# Altium PCB Robotic Claw PCB.PcbDoc
Units mil, origin at the board's own origin, x right, y up, seen from the top; angles counter-clockwise.
Board outline 4050 x 3490 mil, 4 copper layers (Top Layer, Int1 (GND), Int2 (PWR), Bottom Layer), stack 53.912 mil thick; 50 components, 47 nets, 200 pads, 15 vias.
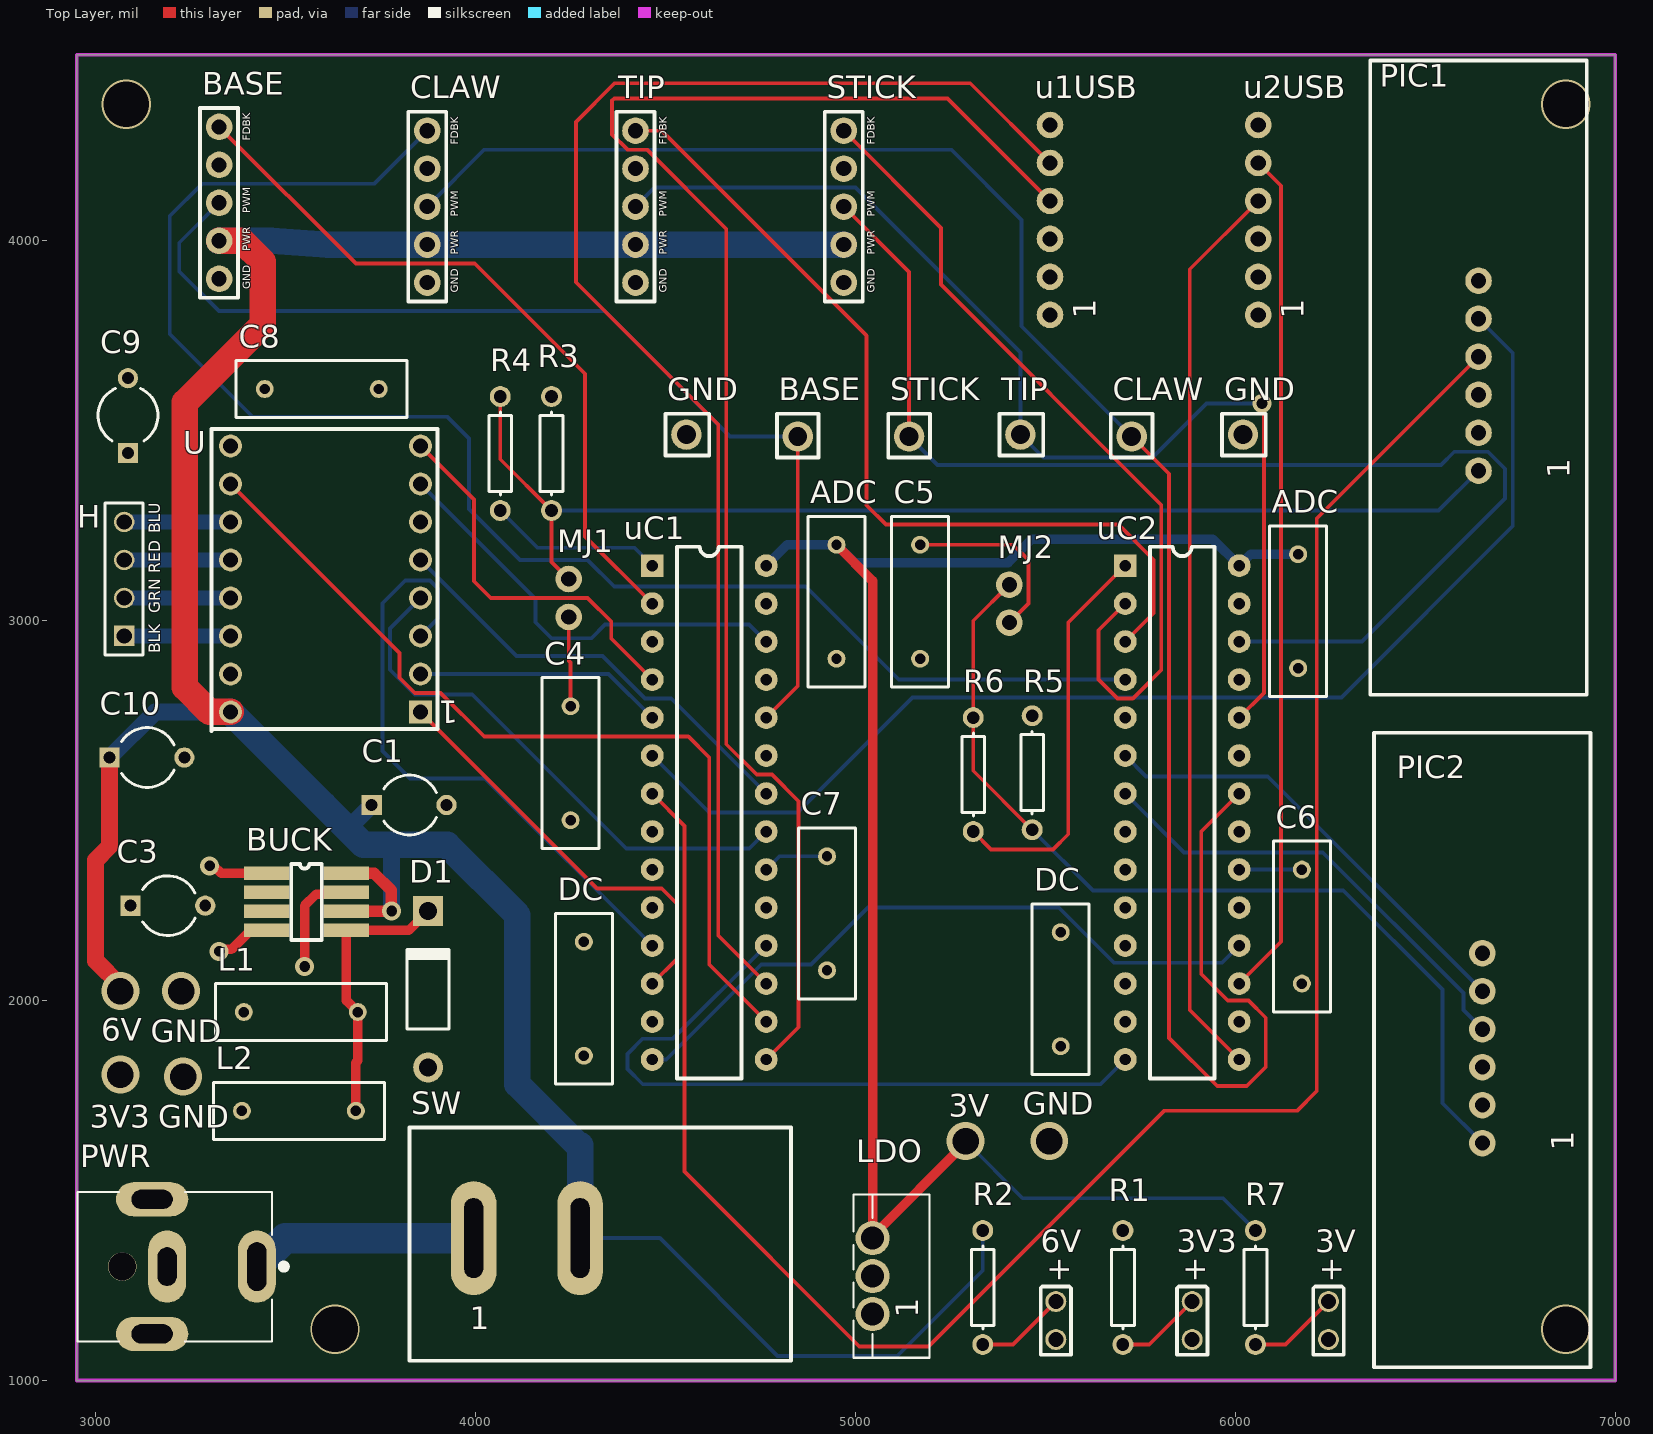
[diagram p0: Top Layer view]
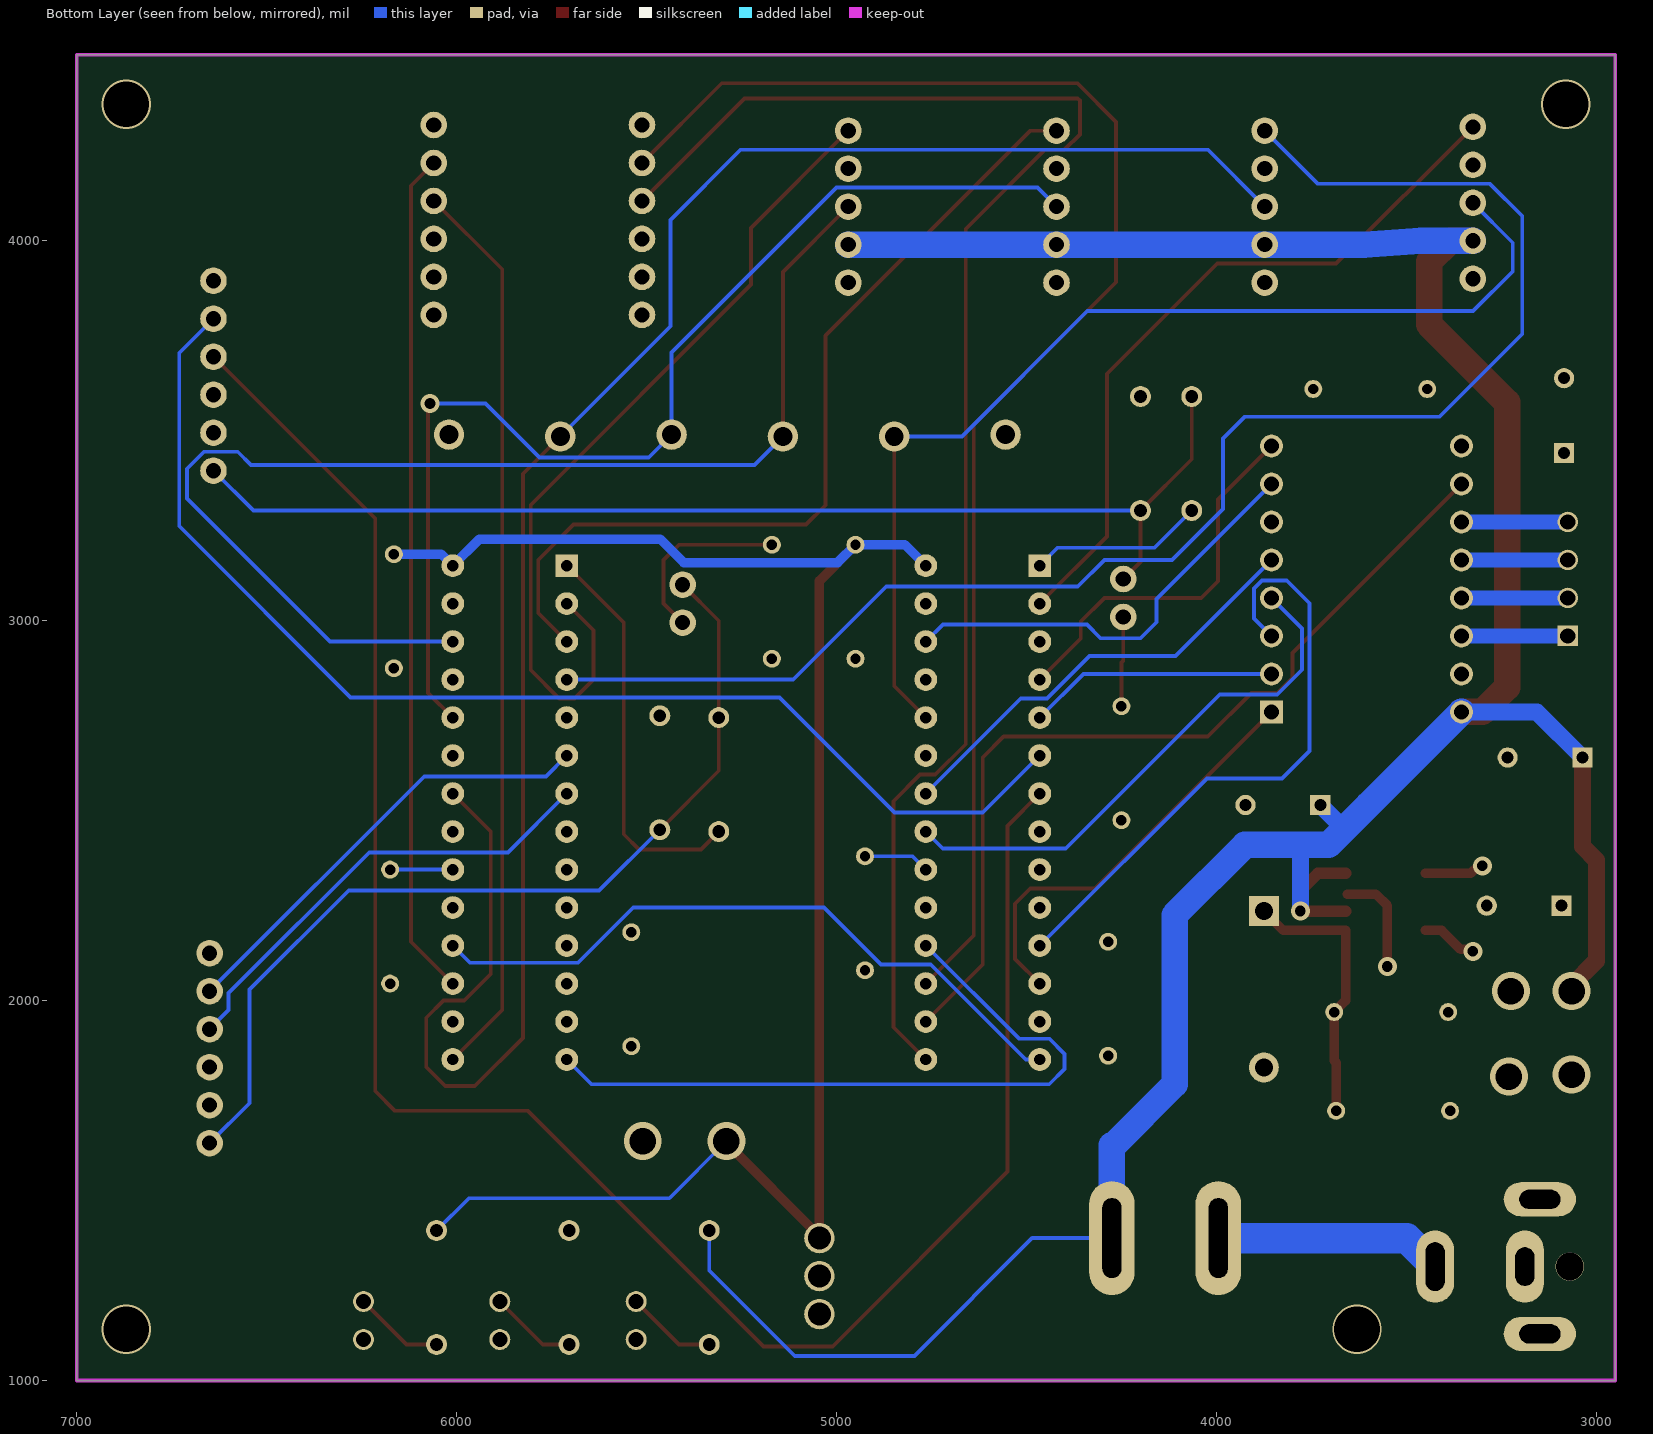
[diagram p1: Bottom Layer view, seen from below]
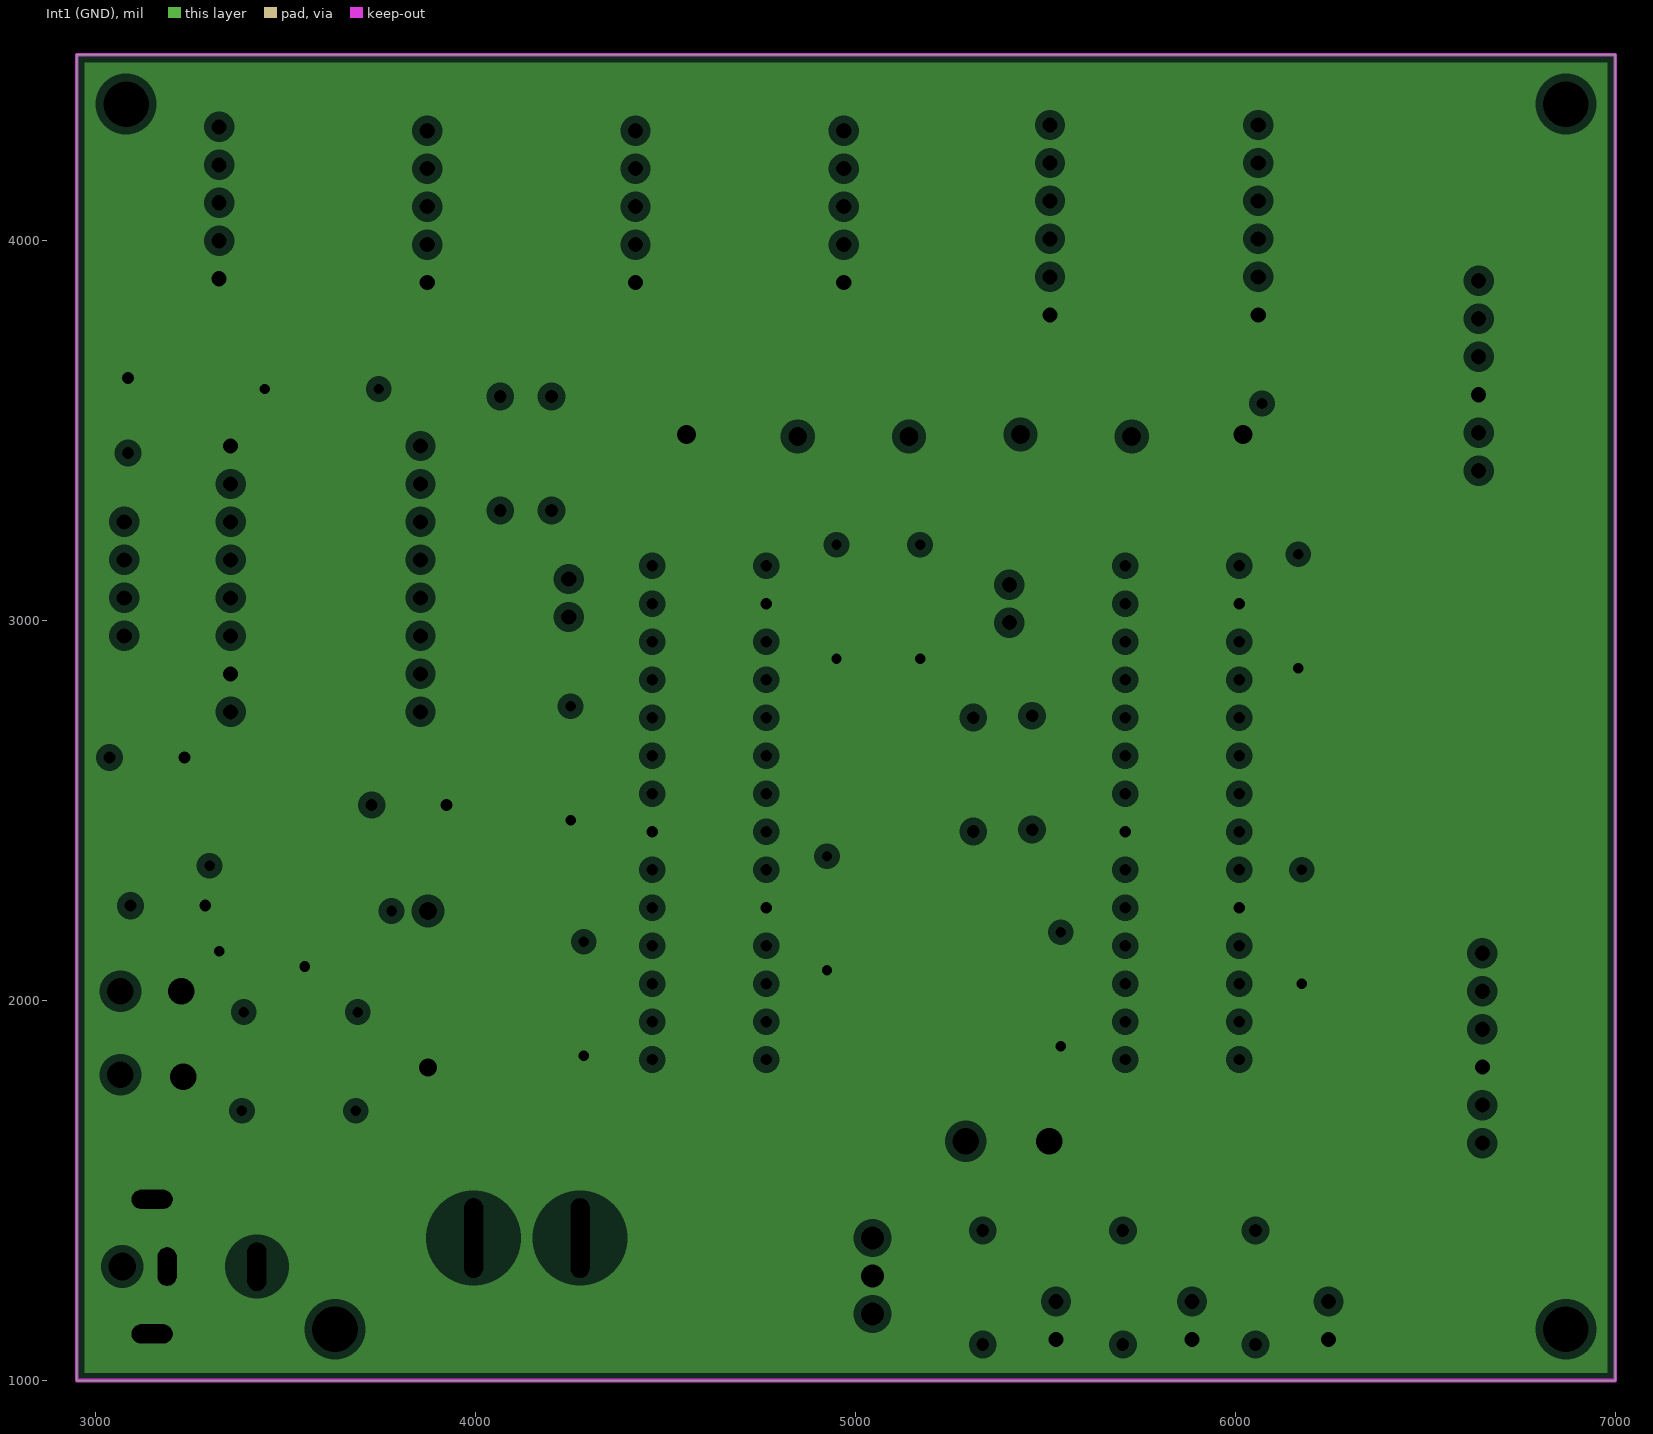
[diagram p2: Int1 (GND), clearances drawn from the general rule]
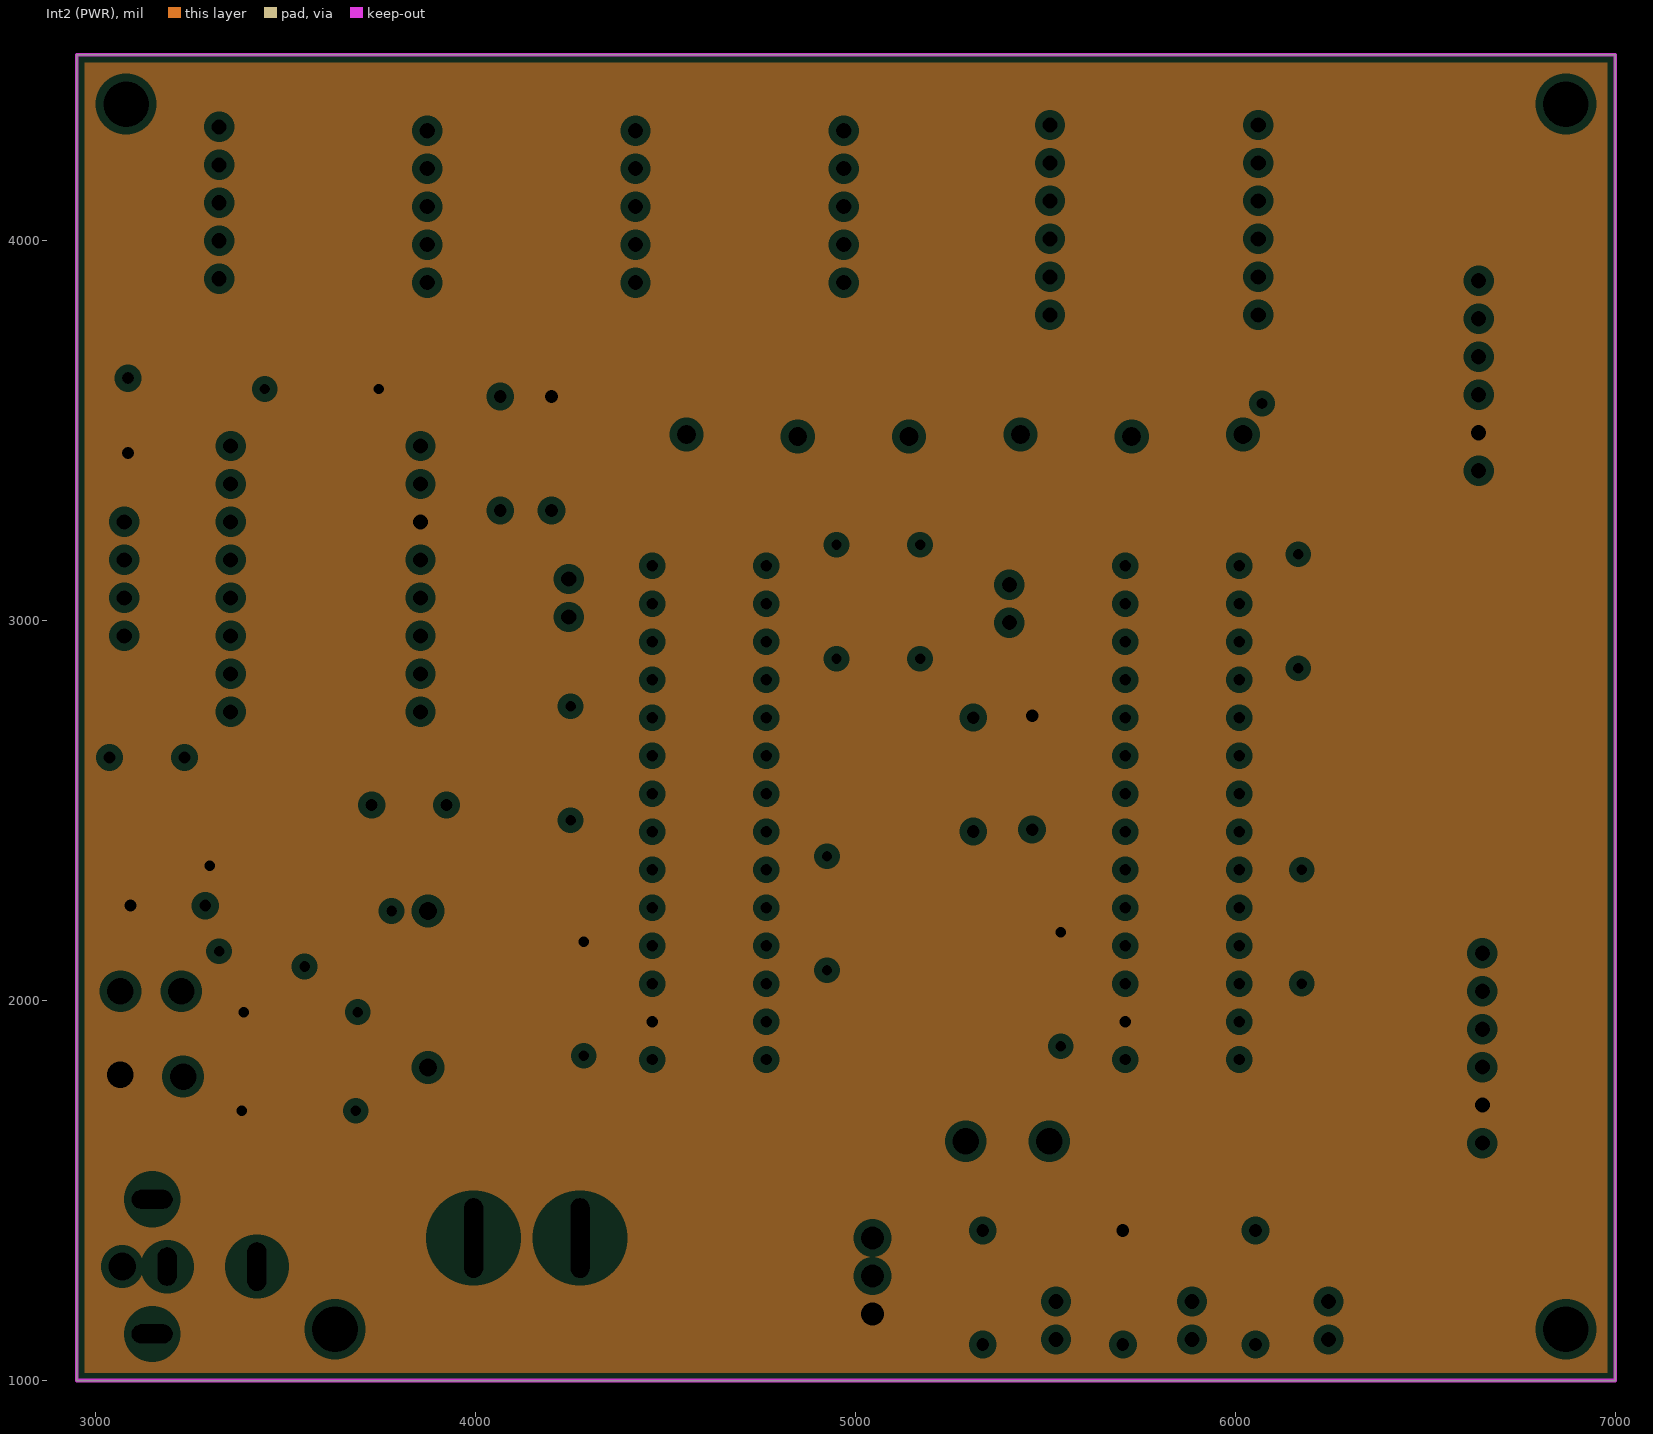
[diagram p3: Int2 (PWR), clearances drawn from the general rule]

## Layer stack, top to bottom
Top Solder: solder mask 1, SM-001, Dk 4
Top Layer: signal copper 1.378
Dielectric 1: prepreg 5.1, PP-017, Dk 4.3
Dielectric 2: prepreg 5.1, PP-017, Dk 4.3
Int1 (GND): plane copper 1.378, net GND
Dielectric 3: core 28, Core-039, Dk 4.8
Int2 (PWR): plane copper 1.378, net 3V3
Dielectric 4: prepreg 5.1, PP-017, Dk 4.3
Dielectric 5: prepreg 5.1, PP-017, Dk 4.3
Bottom Layer: signal copper 1.378
Bottom Solder: solder mask 1, SM-001, Dk 4

## Board outline
2950,1000 7000,1000 7000,4490 2950,4490

## Design rules (kind name [scope] priority, off if disabled: settings)
Clearance [All] p1: gap=10 ignorepadtopadclearanceinfootprint=FALSE except(0: Arc-Hole Track-Hole SMDPad-Hole THPad-Hole Via-Hole Fill-Hole Poly-Hole Region-Hole Text-Hole)
PlaneClearance [All] p1: clearance=20
PlaneConnect [All] p1: planeconnectstyle=Relief reliefexpansion=20 reliefentries=4 reliefconductorwidth=10 reliefairgap=10
PolygonConnect [All] p1: connectstyle=Relief reliefconductorwidth=10 reliefentries=4 polygonreliefangle="90 Angle" airgapwidth=10
RoomDefinition "Robotic Claw Schematic" [InComponentClass('Robotic Claw Schematic')] p1: confinementstyle=ConfineIn formatcopy=TRUE lockcomponents=FALSE outline 7045,1060 20170,1060 20170,2540 7045,2540
RoutingVias [All] p1: holewidth=28 width=50 viastyle="Through Hole" minholewidth=28 minwidth=50 maxholewidth=28 maxwidth=50
SolderMaskExpansion [All] p1: expansion=4 istentingtop=FALSE
Width A2 [InNet('A2')] p1: maxlimit=40 minlimit=40 preferedwidth=40 minimp=50.000000 maximp=50.000000 favimp=50.000000
Width B1 [InNet('B1')] p2: maxlimit=40 minlimit=40 preferedwidth=40 minimp=50.000000 maximp=50.000000 favimp=50.000000
Width B2 [InNet('B2')] p3: maxlimit=40 minlimit=40 preferedwidth=40 minimp=50.000000 maximp=50.000000 favimp=50.000000
Width A1 [InNet('A1')] p4: maxlimit=40 minlimit=40 preferedwidth=40 minimp=50.000000 maximp=50.000000 favimp=50.000000
Width 6V_IN [InNet('6V_IN')] p5: maxlimit=50 minlimit=50 preferedwidth=50 minimp=50.000000 maximp=50.000000 favimp=50.000000
Width 6V [InNet('6V')] p6: maxlimit=45 minlimit=45 preferedwidth=45 minimp=50.000000 maximp=50.000000 favimp=50.000000
Width 3V [InNet('3V')] p7: maxlimit=25 minlimit=25 preferedwidth=25 minimp=50.000000 maximp=50.000000 favimp=50.000000
Width 3V3 [InNet('3V3')] p8: maxlimit=25 minlimit=25 preferedwidth=25 minimp=50.000000 maximp=50.000000 favimp=50.000000
Width [All] p9: maxlimit=10 minlimit=10 preferedwidth=10
28 further rules are at their usual default settings.

## Classes and differential pairs
component class "Robotic Claw Schematic": 3V 3V3 6V ADC BASE BUCK C1 C3 C4 C5 C6 C7 C8 C9 C10 CLAW D1 DC GND H L1 L2 LDO MJ1 MJ2 PIC1 PIC2 PWR R1 R2 R3 R4 R5 R6 R7 STICK TIP U u1USB u2USB uC1 uC2

## Components (designator, comment, footprint, x,y, rotation, side; value= is the part's Value field where it differs from the comment)
3V "LED0" LED-0 6245,1157.95 r90 top
3V3 "LED0" LED-0 5886.18,1157.95 r90 top
6V "LED0" LED-0 5527.36,1157.95 r90 top
ADC "Cap" RAD-0.3 6165,3025 r90 top value=0.1u
ADC "Cap" RAD-0.3 4950,3050 r90 top value=0.1u
BASE "Test Point 2" "Test Point2" 4848,3485 r90 top
BASE "5-PIN HEADER FOR SERVOS WITH FEEDBACK" "5-PIN HEADER FOR SERVOS WITH FEEDBACK" 3325,3900 r90 top
BUCK "BUCK" "6V TO 3V3 BUCK" 3450,2335 r0 top
C1 "Cap2" CAPR5-4X5 3825,2515 r0 top value=33u
C3 "Cap2" CAPR5-4X5 3190,2250 r0 top value=100u
C4 "Cap" RAD-0.3 4250,2625 r90 top value=0.1u
C5 "Cap" RAD-0.3 5170,3050 r90 top value=0.1u
C6 "Cap" RAD-0.3 6175,2195 r90 top value=10u
C7 "Cap" RAD-0.3 4925,2230 r90 top value=10u
C8 "Cap" RAD-0.3 3595,3610 r0 top value=100n
C9 "Cap2" CAPR5-4X5 3085,3540 r90 top value=100u
C10 "Cap2" CAPR5-4X5 3135,2640 r0 top value=100u
CLAW "5-PIN HEADER FOR SERVOS WITH FEEDBACK" "5-PIN HEADER FOR SERVOS WITH FEEDBACK" 3873,3890 r90 top
CLAW "Test Point 2" "Test Point2" 5727,3485 r90 top
D1 "Diode 11DQ03" DO-204AL 3875,2030 r90 top
DC "Cap" RAD-0.3 5540,2030 r90 top value=0.1u
DC "Cap" RAD-0.3 4285,2005 r90 top value=0.1u
GND "Test Point 2" "Test Point2" 6020,3490 r0 top
GND "Test Point 2" "Test Point2" 4555,3490 r0 top
H "4-Pin Header For Steppers" "4-Pin Header for Steppers" 3075,2960 r90 top
L1 "Cap" RAD-0.3 3540,1970 r180 top value=100uH
L2 "Cap" RAD-0.3 3535,1710 r180 top value=100uH
LDO "MCP1826S-3002E/AB" TO-220_AB_MC_MCH 5045,1175 r90 top
MJ1 "Jumper" JUMPER 4245,3010 r90 top
MJ2 "Jumper" JUMPER 5405,2995 r90 top
PIC1 "PICKIT3 Header" "PICKIT3 Header" 6640,3395 r90 top
PIC2 "PICKIT3 Header" "PICKIT3 Header" 6650,1625 r90 top
PWR "Barrel Connector 2.5x5.5mm 8A" "Barrel Connector 2.5x5.5mm 8A" 3424.33,1300 r180 top
R1 "Res1" AXIAL-0.3 5703.82,1245 r90 top value=240
R2 "Res1" AXIAL-0.3 5335,1245 r90 top value=500
R3 "Res1" AXIAL-0.3 4200,3440 r90 top value=10K
R4 "Res1" AXIAL-0.3 4065,3440 r90 top value=470
R5 "Res1" AXIAL-0.3 5465,2600 r90 top value=10K
R6 "Res1" AXIAL-0.3 5310,2595 r90 top value=470
R7 "Res1" AXIAL-0.3 6052.64,1245 r90 top value=240
STICK "Test Point 2" "Test Point2" 5141,3485 r90 top
STICK "5-PIN HEADER FOR SERVOS WITH FEEDBACK" "5-PIN HEADER FOR SERVOS WITH FEEDBACK" 4969,3890 r90 top
SW "ROCKER SWITCH 10A" "ROCKER SWITCH 10A" 3995,1375 r0 top
TIP "Test Point 2" "Test Point2" 5434,3490 r0 top
TIP "5-PIN HEADER FOR SERVOS WITH FEEDBACK" "5-PIN HEADER FOR SERVOS WITH FEEDBACK" 4421,3890 r90 top
U "A4988_STEPPER_MOTOR_DRIVER_CARRIER" "MP6500 Stepper Motor Driver Carrier" 3605,3110 r180 top
u1USB "USB Programming Header" "6 Pin Header" 5512,3805 r90 top
u2USB "USB Programming Header" "6 Pin Header" 6060,3805 r90 top
uC1 "DSPIC33EP512MC502-I/SP" "dsPIC33EP512MC502 - duplicate" 4465,3145 r0 top
uC2 "DSPIC33EP512MC502-I/SP" "dsPIC33EP512MC502 - duplicate" 5710,3145 r0 top

## Footprints (in the part's own frame and the unit in brackets; to place one, negate y for a bottom-side part, rotate by r counter-clockwise, add the part's x,y. Pads: shape width x height; smd on the part's side, far side on the other; paste and mask are expansions set on the pad)
"4-Pin Header for Steppers" [mm] "0.1 INCH SPACING"
  round 1.37 hole 1.02: 01(5.08,0) 02(2.54,0) 03(7.62,0)
  rect 1.37x1.37 hole 1.02: 04(0,0)
  silkscreen extent -1.27,-1.27 8.89,1.27
"5-PIN HEADER FOR SERVOS WITH FEEDBACK" [mil] "FOURTH PIN IS DISCONNECTED"
  round 70 hole 40: 1(0,0) 2(100,0) 3(200,0) 4(300,0) 5(400,0)
  silkscreen extent -50,-50 450,50
"6 Pin Header" [mil]
  round 70 hole 40: 1(0,0) 2(100,0) 3(200,0) 4(300,0) 5(400,0) 6(500,0)
"6V TO 3V3 BUCK" [mil]
  rect 120x35 smd: 1(0,0) 2(0,-50) 3(0,-100) 4(0,-150) 5(210,-150) 6(210,-100) 7(210,-50) 8(210,0)
  silkscreen extent 65,-175 145,25
AXIAL-0.3 [mm] "Axial Device, Thru-Hole; 2 Leads; 0.3 in Pin Spacing"
  round 1.4 hole 0.85: 1(-3.81,0) 2(3.81,0)
  silkscreen extent -2.77,-0.76 2.77,0.76
"Barrel Connector 2.5x5.5mm 8A" [mil] "CUI Devices PJ-063BH"
  oval 100x190 hole 50 slot 128 at 90 deg: 1(0,0)
  oval 100x190 hole 50 slot 101 at 90 deg: 2(236.22,0)
  oval 190x90 hole 50 slot 108 at 0 deg: S1(275.59,177.17) S2(275.59,-177.17)
  round 75 hole 73 unplated: ""(354.33,0)
  silkscreen extent -79,-197 472,197
CAPR5-4X5 [mm] "Capacitor; 2 Leads"
  rect 1.35x1.35 hole 0.8: 1(-2.5,0)
  round 1.35 hole 0.8: 2(2.5,0)
  silkscreen extent -1.69,-2 1.82,2
DO-204AL [mm] "Diode, Axial; Body 5.2 x 2.7 mm (LxDia. max), Lead Dia. 0.86 mm (max)"
  round 2 hole 1.2: 1(-5.23,0)
  rect 2x2 hole 1.2: 2(5.23,0)
  silkscreen extent -2.65,-1.4 2.75,1.4
"dsPIC33EP512MC502 - duplicate" [mil]
  rect 60x60 hole 30: 1(0,0)
  round 60 hole 30: 2(0,-100) 3(0,-200) 4(0,-300) 5(0,-400) 6(0,-500) 7(0,-600) 8(0,-700) 9(0,-800) 10(0,-900) 11(0,-1000) 12(0,-1100) 13(0,-1200) 14(0,-1300) 15(300,-1300) 16(300,-1200) 17(300,-1100) 18(300,-1000) 19(300,-900) 20(300,-800) 21(300,-700) 22(300,-600) 23(300,-500) 24(300,-400) 25(300,-300) 26(300,-200) 27(300,-100) 28(300,0)
  silkscreen extent 65,-1350 235,50
JUMPER [mil]
  round 70 hole 40: 1(0,0) 2(100,0)
LED-0 [mm] "LED; 2 Leads"
  round 1.4 hole 1: 1(1.27,0) 2(-1.27,0)
  silkscreen extent -2.29,-1.02 2.29,1.02
"MP6500 Stepper Motor Driver Carrier" [mm]
  rect 1.53x1.53 hole 1.02: 1(-6.35,8.89)
  round 1.53 hole 1.02: 2(-6.35,6.35) 3(-6.35,3.81) 4(-6.35,1.27) 5(-6.35,-1.27) 6(-6.35,-3.81) 7(-6.35,-6.35) 8(-6.35,-8.89) 9(6.35,-8.89) 10(6.35,-6.35) 11(6.35,-3.81) 12(6.35,-1.27) 13(6.35,1.27) 14(6.35,3.81) 15(6.35,6.35) 16(6.35,8.89)
  silkscreen extent -7.49,-10.03 7.62,10.16
"PICKIT3 Header" [mil]
  round 70 hole 40: 1(0,0) 2(100,0) 3(200,0) 4(300,0) 5(400,0) 6(500,0)
  silkscreen extent -590,-285 1080,285
RAD-0.3 [mm] "Radial Cap, Thru-Hole; 2 Leads; 0.3 in Pin Spacing"
  round 1.2 hole 0.7: 1(-3.81,0) 2(3.81,0)
  silkscreen extent -5.71,-1.91 5.71,1.91
"ROCKER SWITCH 10A" [mil] "SWITCH COMPONENTS RF1-1A-DC-2-B"
  oval 120x300 hole 210 slot 50 at 0 deg: 1(0,0) 2(280,0)
  silkscreen extent -169,-323 835,291
"Test Point2" [mil] "TP"
  round 80 hole 50: 1(0,0)
  silkscreen extent -55,-55 60,55
TO-220_AB_MC_MCH [mil]
  round 90 / inner round 80 / far side round 80 hole 60 mask+0: 1(0,0) 2(100,0) 3(200,0)
  silkscreen extent -115,-150 315,50, body extent 0,0 10,10, height 10

## Part data
3V 3V3 6V: "Typical INFRARED GaAs LED", LatestRevisionDate=08-Jul-2005, LatestRevisionNote="Mech Layer 1 removed.", PackageDescription="LED; 2 Leads", PackageReference=LED-0, Published=8-Jun-2000, Publisher="Altium Limited"
ADC ADC C1 C3 C4 C5 C6 C7 C8 C9 C10 DC DC L1 L2: "Capacitor", Publisher="Altium Limited"
  ADC ADC C4 C5 C6 C7 C8 DC DC L1 L2: LatestRevisionDate=17-Jul-2002, LatestRevisionNote="Re-released for DXP Platform.", PackageDescription="Radial Cap, Thru-Hole; 2 Leads; 0.3 in Pin Spacing", PackageReference=RAD-0.3, Published=8-Jun-2000
  C1 C3 C9 C10: PackageDescription="Capacitor; 2 Leads", PackageReference=CAPR5-4X5, Published=23-Sep-2002
BASE CLAW STICK TIP: "Fourth pin is disconnected."
D1: "Schottky Rectifier", Code_JEDEC=DO-204-AL, ComponentLink1Description="Manufacturer Link", ComponentLink1URL=http://www.irf.com/, ComponentLink2Description=Datasheet, ComponentLink2URL=http://www.irf.com/product-info/datasheets/data/11dq03.pdf, DatasheetVersion=Dec-1997, LatestRevisionDate=17-Jul-2002, LatestRevisionNote="Re-released for DXP Platform.", PackageDescription="Diode, Axial; Body 5.2 x 2.7 mm (LxDia. max), Lead Dia. 0.86 mm (max)", PackageReference=DO-204AL, Published=8-Jun-2000, Publisher="Altium Limited"
H: "TSW - Samtec 2.54mm Pin Header 11.30mm Overall Pin Length (23) - Fast Stock", Package=None, Availability="In Stock", Check_prices=https://www.snapeda.com/parts/TSW-104-23-S-S/Samtec/view-part/2892034/?ref=eda, MF=Samtec, MP=TSW-104-23-S-S, Price=None, Purchase-URL=https://pricing.snapeda.com/search/part/TSW-104-23-S-S/?ref=eda, SnapEDA_Link=https://www.snapeda.com/parts/TSW-104-23-S-S/Samtec/view-part/2892034/?ref=snap
LDO: "No Description Available", Built_By=EMA_Jessica, Copyright="Copyright (C) 2018 Accelerated Designs. All rights reserved", Manufacturer_Part_Number=MCP1826S-3002E/AB, RefDes=RefDes, SourceLibrary=Microchip_2019-08-23_21, Type=DEV, Vendor=Microchip
PWR: "2.5 x 5.5 mm, 8.0 A,   / CUI Devices PJ-063BH", Package=None, Availability=Unavailable, MF="CUI Devices", MP=PJ-063BH, Price=None, SnapEDA_Link=https://www.snapeda.com/parts/PJ-063BH/CUI%20Devices/view-part/703426/?ref=snap
R1 R2 R3 R4 R5 R6 R7: "Resistor", LatestRevisionDate=17-Jul-2002, LatestRevisionNote="Re-released for DXP Platform.", PackageDescription="Axial Device, Thru-Hole; 2 Leads; 0.3 in Pin Spacing", PackageReference=AXIAL-0.3, Published=8-Jun-2000, Publisher="Altium Limited"
SW: "SWITCH COMPONENTS RF1-1A-DC-2-B"
U: "Stepper Motor Driver", Package=None, Availability=Unavailable, MF=Pololu, MP="A4988 STEPPER MOTOR DRIVER CARRIER", Price=None, SnapEDA_Link=https://www.snapeda.com/parts/A4988%20STEPPER%20MOTOR%20DRIVER%20CARRIER/Pololu/view-part/1499394/?ref=snap
uC1 uC2: "28-Pin DIP", Mfr_Name=Microchip, Copyright="Copyright (C) 2022 Ultra Librarian. All rights reserved.", Digi-Key_Part_Number_1=DSPIC33EP512MC502-I/SP-ND, Manufacturer_Part_Number=DSPIC33EP512MC502-I/SP, RefDes=RefDes, Type=DEV

## Via types
v1: diameter 100, hole 70, Top Layer to Bottom Layer, 6 vias
v2: diameter 50, hole 28, Top Layer to Bottom Layer, 5 vias
v3: diameter 130, hole 120, Top Layer to Bottom Layer, 4 vias

## Nets (pads, with @x,y where several pads share a name; then routed paths per layer and width w, separated by ;. In a path a pad name is that pad's centre, name@x,y a point inside that pad or via, vN(x,y) a via of type N, cw(c..) or ccw(c..) an arc to the next point about the centre after c; other vN are vias at no path point)
3V: ADC.2 LDO.3 R7.2 uC1.28 uC2.28 | length 4585.2
  Top Layer w25: ADC.2@4950,3200 5045,3105 LDO.3@5045,1380 ; LDO.3 LDO.3@5045,1380 ; v1(5290,1630) 5290,1625 LDO.3@5045,1380
  Bottom Layer w10: v1(5290,1630) 5440,1480 5967.64,1480 R7.2
  Bottom Layer w25: uC1.28 4820,3200 4950,3200 4997,3153 5402,3153 5464,3215 5940,3215 uC2.28 6040,3175 ADC.2@6165,3175
3V3: BUCK.1 C3.1 C8.2 C9.1 DC.2 L1.2 L2.2 LDO.1 PIC1.2 PIC2.2 R1.2 R3.2 R5.2 U.6 uC1.13 uC2.13 | length 158.3
  Top Layer w10: v2(3300,2355) v2@3310.82,2355
  Top Layer w25: v2@3310.82,2355 3330.82,2335 BUCK.1
  other v1: 3065,1805
6V: BASE.2 BUCK.6 BUCK.8 C1.1 C10.1 CLAW.2 R2.2 STICK.2 SW.2 TIP.2 U.16 | length 8019.8
  Top Layer w30: BUCK.6 v2@3778.09,2235 ; BUCK.8 3733.46,2335 3778.09,2290.38 v2@3778.09,2236.91
  Top Layer w45: C10.1 3036.57,2406.25 3000,2369.68 3000,2104.88 3065,2039.88 v1(3065,2025) ; v2@3778.09,2235 v2(3779.04,2235.96) v2@3778.09,2236.91
  Top Layer w70: BASE.2 3385,4000 3440,3945 3440,3780 3235,3575 3235,2825 3300,2760 U.16
  Bottom Layer w10: SW.2 4485,1375 4795,1065 5110,1065 5335,1290 R2.2
  Bottom Layer w45: C10.1 3156.57,2760 U.16 ; 3660,2455 3666.57,2455 C1.1 ; v2(3779.04,2235.96) 3779.04,2409.04 3780,2410 ; 4270.85,1619.15 4275,1619.15
  Bottom Layer w70: BASE.2 3462.71,4000 3610.23,3990 CLAW.2 TIP.2 STICK.2 ; U.16 3600,2515 3660,2455 3705,2410 3780,2410 3925,2410 4110,2225 4110,1780 4270.85,1619.15 ; SW.2 4275,1619.15
6V_IN: PWR.1 SW.1 | length 601.7
  Bottom Layer w80: PWR.1 3499.33,1375 SW.1
A1: H.01 U.12 | length 280
  Bottom Layer w40: H.01 U.12
A2: H.03 U.11 | length 280
  Bottom Layer w40: H.03 U.11
B1: H.02 U.13 | length 280
  Bottom Layer w40: H.02 U.13
B2: H.04 U.14 | length 280
  Bottom Layer w40: H.04 U.14
BASE_FDBK: BASE.5 uC1.2 | length 1910.6
  Top Layer w10: BASE.5 3685,3940 3998,3940 4288,3650 4288,3222 uC1.2
BASE_PWM: BASE.1@4848,3485 BASE.3 uC1.24 | length 2806.5
  Top Layer w10: uC1.24 4848,2828 BASE.1@4848,3485
  Bottom Layer w10: BASE.3 3220,3995 3220,3919.28 3324.28,3815 4340,3815 4342.93,3812.07 4670,3485 BASE.1@4848,3485
CLAW_FDBK: CLAW.5 uC2.4 | length 4082.3
  Bottom Layer w10: CLAW.5 3733,4150 3280,4150 3195,4065 3195,3754.6 3408.71,3540.89 3409.67,3539.93 3412.6,3537 3926,3537 3928.93,3534.07 3983,3480 3983,3294 4117,3160 4295,3160 4365,3090 4869,3090 5114,2845 uC2.4
CLAW_PWM: CLAW.1@5727,3485 CLAW.3 uC2.22 | length 5208.6
  Top Layer w10: CLAW.1@5727,3485 5825,3387 5825,1902 5952,1775 6030,1775 6080,1825 6080,1955 6034.5,2000.5 5980,2000.5 5910,2070.5 5910,2445 uC2.22
  Bottom Layer w10: CLAW.3 4023,4240 5252,4240 5437,4055 5437,3775 CLAW.1@5727,3485
DIRECTION: U.8 uC1.4 | length 1017
  Top Layer w10: U.8 3996,3319 3996,3104 4040,3060 4295,3060 4357,2998 4357,2953 uC1.4
ENABLE: U.1 uC1.12 | length 1121.1
  Top Layer w10: U.1 4320,2295 4490,2295 4530,2255 4530,2110 uC1.12
GND: 3V3.2 3V.2 6V.2 ADC.1 BASE.1@3325,3900 BUCK.4 BUCK.7 C1.2 C3.2 C4.1 C5.1 C6.1 C7.1 C8.1 C9.2 C10.2 CLAW.1@3873,3890 D1.1 DC.1 GND.1 LDO.2 PIC1.3 PIC2.3 PWR.2 PWR.S1 PWR.S2 STICK.1@4969,3890 TIP.1@4421,3890 u1USB.1 u2USB.1 U.9 U.15 uC1.8 uC1.19 uC1.27 uC2.8 uC2.19 uC2.27 | length 432.3
  Top Layer w10: BUCK.7@3655,2280 BUCK.7
  Top Layer w25: v2(3325,2130) 3329.78,2134.78 3357.28,2134.78 3407.5,2185 BUCK.4 ; v2(3550,2090) 3550,2250 3580,2280 BUCK.7@3655,2280
  other v1: 5510,1630 3230,1800 3225,2025
I1: U.4 uC1.21 | length 1425.5
  Bottom Layer w10: U.4 3775,2980 3775,2871 3840,2806 3991,2806 4396.5,2400.5 4720.5,2400.5 uC1.21
I2: U.5 uC1.22 | length 1164.7
  Bottom Layer w10: U.5 4108,2907 4334,2907 4446,2795 4515,2795 uC1.22
INT0: U.10 uC1.16 | length 2353.4
  Top Layer w10: U.10 3800,2915 3800,2850 3840,2810 3908,2810 4023,2695 4560,2695 4615,2640 4615,2095 uC1.16
LX: BUCK.5 D1.2 L1.1 L2.1 | length 725.6
  Top Layer w25: L2.1 3685,1837 3690,1842 L1.1 3660,2000 BUCK.5 3824.09,2185 D1.2
MCLR_CAP1: C4.2 MJ1.1 | length 237.1
  Top Layer w10: MJ1.1 4245,2895 4250,2890 C4.2
MCLR_CAP2: C5.2 MJ2.1 | length 487.3
  Top Layer w10: C5.2 5415,3200 5455,3160 5455,3045 MJ2.1
MS1: U.2 uC1.5 | length 657.6
  Bottom Layer w10: U.2 4350,2860 uC1.5
MS2: U.3 uC1.11 | length 1634.7
  Bottom Layer w10: U.3 3901,3006 3901,3085 3880,3106 3815,3106 3755,3046 3755,2657 3827,2585 4025,2585 uC1.11
Net3V3_1: 3V3.1 R1.1 | length 229.1
  Top Layer w10: R1.1 5773.23,1095 3V3.1
Net3V_1: 3V.1 R7.1 | length 239.1
  Top Layer w10: R7.1 6132.05,1095 3V.1
Net6V_1: 6V.1 R2.1 | length 239.1
  Top Layer w10: R2.1 5414.41,1095 6V.1
STEPPER_STEP: U.7 uC1.26 | length 1147.5
  Bottom Layer w10: U.7 4158,3057 4158,2996 4200,2954 4305,2954 4341,2990 4720,2990 uC1.26
STICK_FDBK: STICK.5 uC2.2 | length 2212.1
  Top Layer w10: STICK.5 5225,4034 5225,3885 5805,3305 5805,2870 5730,2795 5690,2795 5640,2845 5640,2975 uC2.2
STICK_PWM: STICK.1@5141,3485 STICK.3 uC2.26 | length 3243.6
  Top Layer w10: STICK.3 5141,3918 STICK.1@5141,3485
  Bottom Layer w10: STICK.1@5141,3485 5216,3410 6541,3410 6576,3445 6665,3445 6710,3400 6710,3322 6333,2945 uC2.26
TIP_FDBK: TIP.5 uC2.3 | length 2339.6
  Top Layer w10: TIP.5 4489.41,4290 5029,3750.41 5029,3304 5080,3253 5692,3253 5785,3160 5785,3020 uC2.3
TIP_PWM: TIP.1@5434,3490 TIP.3 uC2.24 | length 3005.1
  Top Layer w10: uC2.24 6075,2810 6075,3567 v2(6070,3572)
  Bottom Layer w10: TIP.3 4471,4140 5000,4140 5434,3706 5434,3490 5494,3430 5782,3430 5924,3572 v2(6070,3572)
u1MCLR1: R4.1 uC1.1 | length 460.1
  Bottom Layer w10: R4.1 4163,3192 4418,3192 uC1.1
u1MCLR2: MJ1.2 PIC1.1 R3.1 R4.2 | length 3038.1
  Top Layer w10: R4.2 4065,3425 R3.1 4200,3155 MJ1.2
  Bottom Layer w10: R3.1 6535,3290 PIC1.1
u1PGC1: PIC1.5 uC1.6 | length 3222.7
  Bottom Layer w10: uC1.6 4615,2495 4847,2495 5150,2798 6279,2798 6730,3249 6730,3705 PIC1.5
u1PGD1: PIC1.4 uC1.7 | length 5272.6
  Top Layer w10: uC1.7 4550,2460 4550,1550 5010,1090 5192,1090 5812,1710 6162,1710 6214,1762 6214,3269 PIC1.4
u1RX1: u1USB.4 uC1.15 | length 4083
  Top Layer w10: uC1.15 4850,1930 4850,2525 4780,2595 4740,2595 4660,2675 4660,4031 4451,4240 4399.43,4240 4359.43,4280 4359.43,4369.14 4365.29,4375 5242,4375 u1USB.4
u1RX2: uC1.14 uC2.18 | length 1789.4
  Bottom Layer w10: uC1.14 4501.85,1845 4751.85,2095 4883,2095 5033,2245 5535,2245 5680,2100 5965,2100 uC2.18
u1TX1: u1USB.5 uC1.17 | length 3852.8
  Top Layer w10: uC1.17 4639,2171 4639,3516 4264,3891 4264,4313 4366,4415 5302,4415 u1USB.5
u1TX2: uC1.18 uC2.14 | length 1876.5
  Bottom Layer w10: uC1.18 4520,1900 4440,1900 4400,1860 4400,1820 4440,1780 5645,1780 uC2.14
u1VCAP: C7.2 uC1.20 | length 174.5
  Bottom Layer w10: uC1.20 4800,2380 C7.2
u2MCLR1: R6.1 uC2.1 | length 1055.2
  Top Layer w10: R6.1 5357,2398 5520,2398 5560,2438 5560,2995 uC2.1
u2MCLR2: MJ2.2 PIC2.1 R5.1 R6.2 | length 2450.4
  Top Layer w10: MJ2.2 5310,3000 R6.2 5310,2605 R5.1
  Bottom Layer w10: R5.1 5625,2290 6284,2290 6545,2029 6545,1730 PIC2.1
u2PGC1: PIC2.5 uC2.6 | length 1196.8
  Bottom Layer w10: uC2.6 5765,2590 6085,2590 PIC2.5
u2PGD1: PIC2.4 uC2.7 | length 1223.2
  Bottom Layer w10: uC2.7 5865,2390 6230,2390 6600,2020 6600,1975 PIC2.4
u2RX1: u2USB.4 uC2.15 | length 2388.4
  Top Layer w10: uC2.15 5880,1975 5880,3925 u2USB.4
u2TX1: u2USB.5 uC2.17 | length 2230.4
  Top Layer w10: uC2.17 6120,2155 6120,4145 u2USB.5
u2VCAP: C6.2 uC2.20 | length 165
  Bottom Layer w10: uC2.20 C6.2
pads on no net: BASE.4 BUCK.2 BUCK.3 CLAW.4 PIC1.6 PIC2.6 PWR. STICK.4 TIP.4 u1USB.2 u1USB.3 u1USB.6 u2USB.2 u2USB.3 u2USB.6 uC1.3 uC1.9 uC1.10 uC1.23 uC1.25 uC2.5 uC2.9 uC2.10 uC2.11 uC2.12 uC2.16 uC2.21 uC2.23 uC2.25
copper on no net:
  other v3: 3630,1135 6870,1135 3080,4360 6870,4360

## Polygon pours and split planes (outlines as drawn)
GND on Int1 (GND) (split plane): 6979.9,1020.1 2970.1,1020.1 2970.1,4469.9 6979.9,4469.9
3V3 on Int2 (PWR) (split plane): 6979.9,1020.1 2970.1,1020.1 2970.1,4469.9 6979.9,4469.9

## Keep-outs
Keep-Out Layer:
  the board outline again, w10

## Silkscreen, mask and mechanical layers (free items; w line width, h text height)
Top Overlay:
  text "6V" at 3015,1895 h60
  text "GND" at 3145,1890 h60
  text "GND" at 5440,1700 h60
  text "3V" at 5245,1695 h60
  text "3V3" at 2985,1665 h60
  text "GND" at 3165,1665 h60

## Text inside footprints (layer, text, board x,y; h text height)
3V: Top Overlay "+" at 6280,1257.95 h60 r90
3V3: Top Overlay "+" at 5921.18,1257.95 h60 r90
6V: Top Overlay "+" at 5562.36,1257.95 h60 r90
BASE: Top Overlay "FDBK" at 3407,4263 h20 r90; Top Overlay "PWM" at 3407,4073 h20 r90; Top Overlay "PWR" at 3407,3973 h20 r90; Top Overlay "GND" at 3407,3873 h20 r90
CLAW: Top Overlay "FDBK" at 3955,4253 h20 r90; Top Overlay "PWM" at 3955,4063 h20 r90; Top Overlay "PWR" at 3955,3963 h20 r90; Top Overlay "GND" at 3955,3863 h20 r90
H: Top Overlay "BLU" at 3170,3230 h30 r90; Top Overlay "GRN" at 3170,3020 h30 r90; Top Overlay "BLK" at 3170,2915 h30 r90; Top Overlay "RED" at 3170,3125 h30 r90
LDO: Top Overlay "1" at 5165,1165 h60 r90
PIC1: Top Overlay "1" at 6880,3375 h60 r90
PIC2: Top Overlay "1" at 6890,1605 h60 r90
STICK: Top Overlay "FDBK" at 5051,4253 h20 r90; Top Overlay "PWM" at 5051,4063 h20 r90; Top Overlay "PWR" at 5051,3963 h20 r90; Top Overlay "GND" at 5051,3863 h20 r90
SW: Top Overlay "1" at 3985,1135 h60
TIP: Top Overlay "FDBK" at 4503,4253 h20 r90; Top Overlay "PWM" at 4503,4063 h20 r90; Top Overlay "PWR" at 4503,3963 h20 r90; Top Overlay "GND" at 4503,3863 h20 r90
U: Top Overlay "1" at 3955,2790 h60 r180
u1USB: Top Overlay "1" at 5632,3795 h60 r90
u2USB: Top Overlay "1" at 6180,3795 h60 r90